# EAGLE board Glorious Rottis-Bojo (EAGLE 7.6.0)

Size 56.82 x 53.33 mm. Coordinates in mm from the lower left corner, seen from the top.
Outline: 0,0 56.82,0 56.82,53.33 0,53.33 0,0
Copper layers (1*16): Top 0.035mm / dielectric 1.5mm / Bottom 0.035mm
Design rules "default": minimum track width 10mil, minimum drill 24mil, track to track 8mil, track to pad 8mil, pad to pad 8mil, via to via 8mil, smd to smd 8mil, copper to edge 40mil, drill to drill 8mil, minimum pad ring 10mil, minimum via ring 8mil, stop-mask expansion 4mil, vias tented up to drill 0mil, thermal gap 10mil

## Footprints (pad centres in the part's own frame; a part is rotated, then mirrored left to right if it is on the bottom)
LED5MM = drill 0.813 octagon: A -1.27,0; K 1.27,0
0207/10 = drill 0.813 octagon: 1 -5.08,0; 2 5.08,0
B25V = drill 0.813 long: A 2.54,0.635; E -2.54,0.635; S 0,0.635
TL1105 = drill 1 pad 1.676: 1 -2.25,3.25; 2 2.25,3.25; 3 -2.25,-3.25; 4 2.25,-3.25

## Placement (x,y rotation side)
D1  [LED5MM]  5,35.48 0 top
D2  [LED5MM]  5,73.58 0 top  (outside the outline)
D3  [LED5MM]  5,111.68 0 top  (outside the outline)
R1  1k‎Ω  [0207/10]  5,22.78 0 top
R2  1k‎Ω  [0207/10]  5,60.88 0 top  (outside the outline)
R3  1k‎Ω  [0207/10]  5,98.98 0 top  (outside the outline)
Rpot2  1k‎Ω  [B25V]  5,86.28 0 top  (outside the outline)
S1  [TL1105]  5,10.08 0 top
S2  [TL1105]  5,48.18 0 top

## Library data of the parts
D1-D3 R1-R3 Rpot2 S1 S2 = AUTODESK_CIRCUITS_BREADBOARD

## Nets
N$1: S1.4
N$2: R1.2 S1.1
N$3: S1.3
N$4: D1.A R1.1
N$5: S2.4
N$6: R2.2 S2.1
N$7: S2.3
N$8: D2.A R2.1
N$9: D1.K D2.K D3.K Rpot2.E
N$10: R3.2 Rpot2.S
N$11: D3.A R3.1
N$12: Rpot2.A S1.2 S2.2

## Tracks (layer width: path | path; a pad name or v marks a point on that pad's centre or on a via)
N$2  (1 unrouted)
N$4  (1 unrouted)
N$6  (1 unrouted)
N$8  (1 unrouted)
N$9  (3 unrouted)
N$10  (1 unrouted)
N$11  (1 unrouted)
N$12  (2 unrouted)